# Altium PCB drv8313.pcbdoc
Units mil, origin at the board's own origin, x right, y up, seen from the top; angles counter-clockwise.
Board outline 1875 x 2452.74 mil, 2 copper layers (Top Layer, Bottom Layer); 13 components, 19 nets, 83 pads, 12 vias.
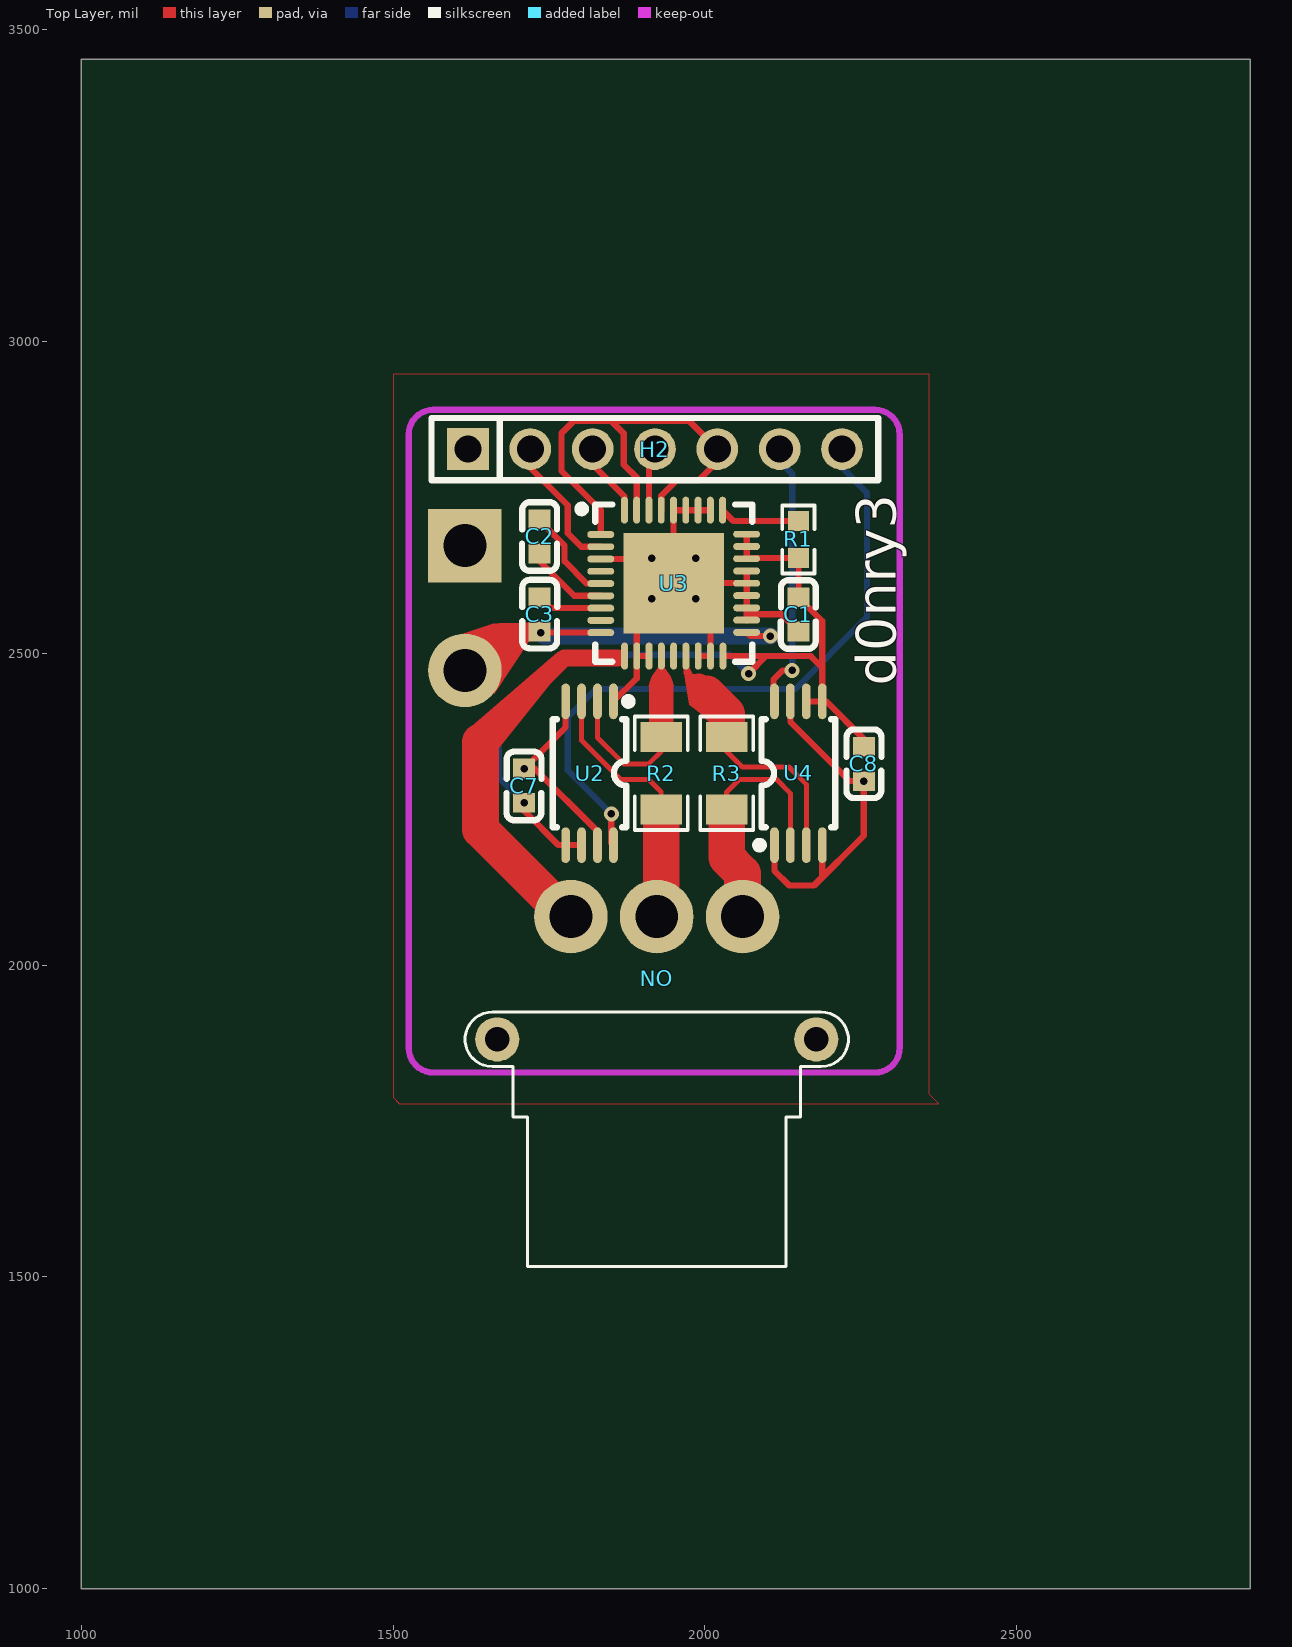
[diagram p0: Top Layer view]
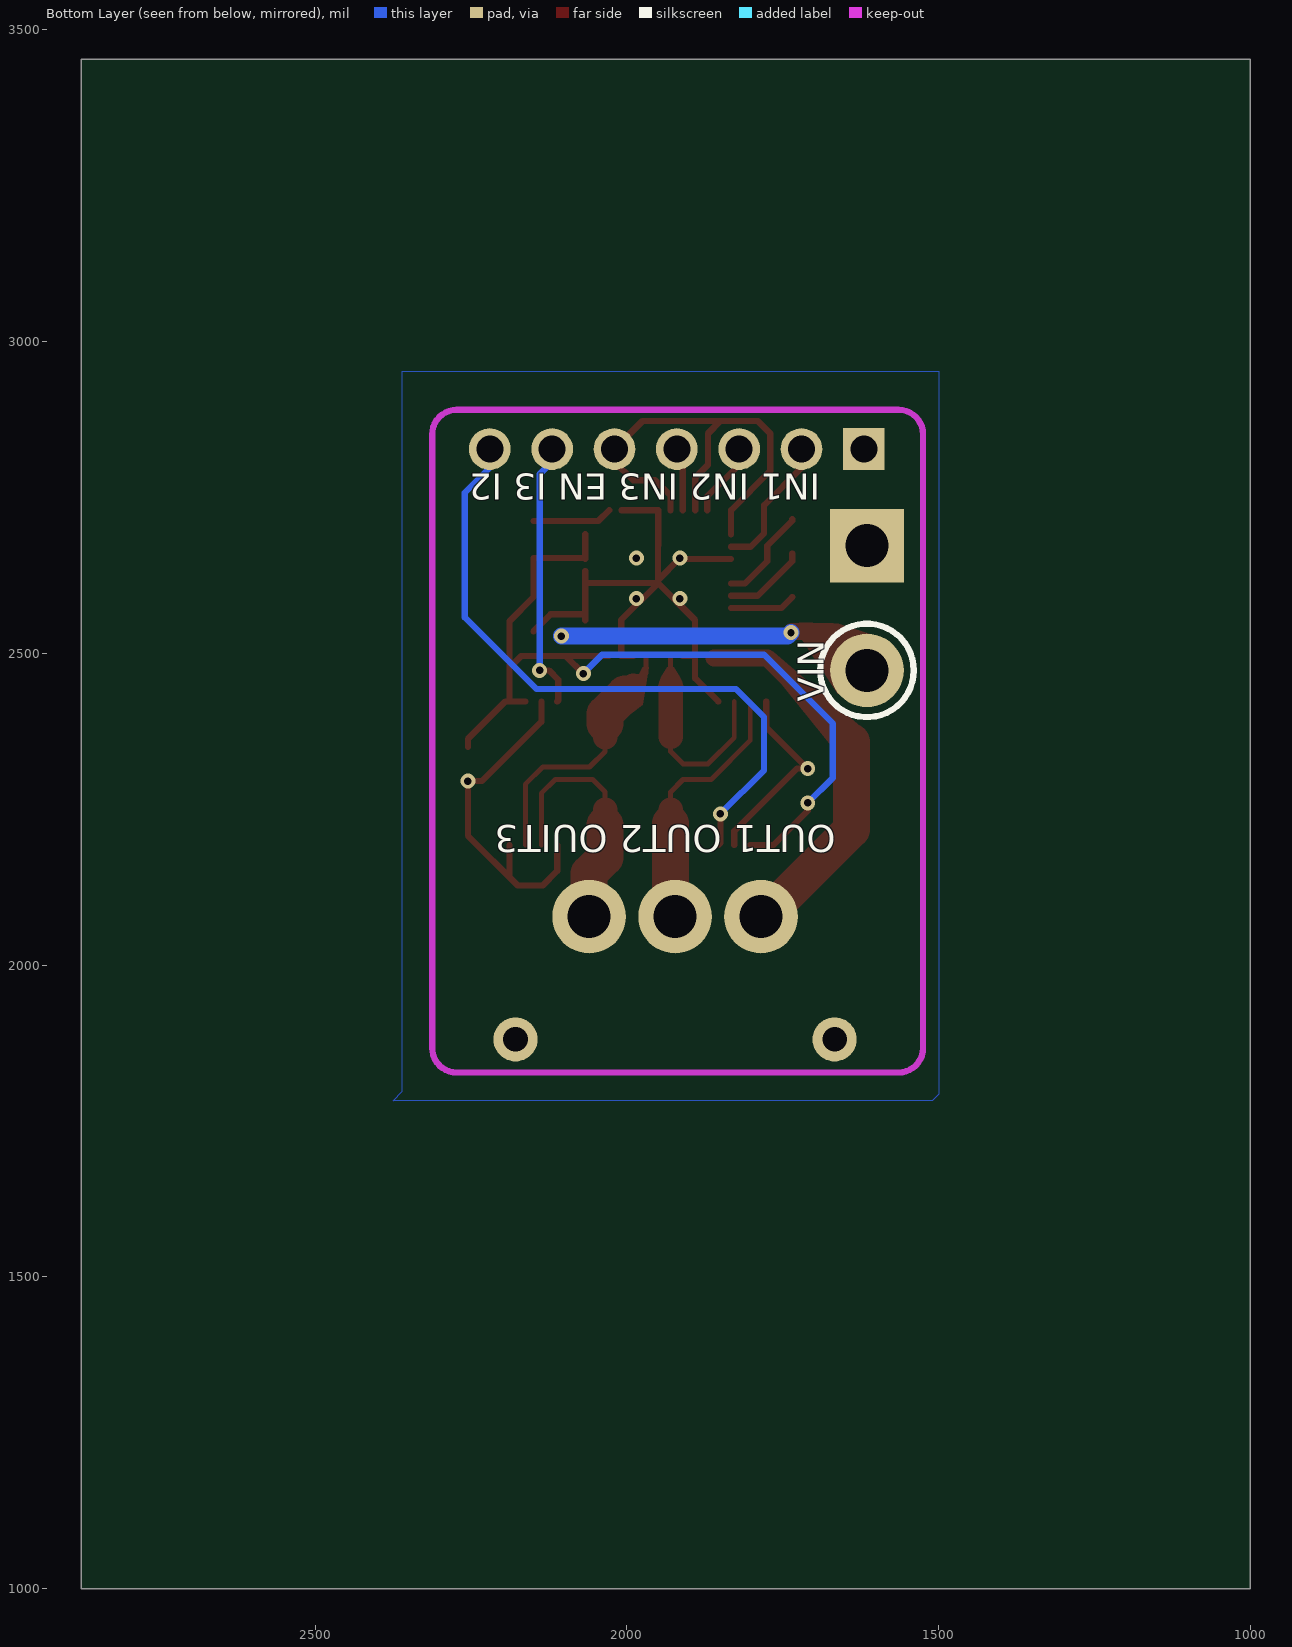
[diagram p1: Bottom Layer view, seen from below]

## Layer stack, top to bottom
Top Layer: signal copper (thickness not stored)
Dielectric: dielectric 12.6, FR-4, Dk 4.8
Bottom Layer: signal copper (thickness not stored)

## Board outline
2875,1000 1000,1000 1000,3452.74 2875,3452.74

## Components (designator, comment, footprint, x,y, rotation, side; value= is the part's Value field where it differs from the comment)
C1 "470nF" C0603 2150,2562.74 r90 top
C2 "10nF" C0603 1735,2687.74 r90 top
C3 "100nF" C0603 1735,2562.74 r270 top
C7 "100nF" C0603 1710,2287.74 r90 top
C8 "100nF" C0603 2255,2322.74 r270 top
H2 "KH-2.54PH180-1X7P-L11.5" HDR-TH_7P-P2.54-V-M 1920,2827.74 r0 top
NO "MR30PW-FB" MR30PW-FB 1785,2077.74 r90 top
R1 "10K" R0603 2150,2682.74 r270 top
R2 "0.01" R1206 1930,2307.74 r90 top
R3 "0.01" R1206 2035,2307.74 r270 top
U2 "INA240A2PWR" TSSOP-8_L4.4-W3.0-P0.65-LS6.4-BL 1815,2307.74 r180 top
U3 "DRV8313RHHR" VQFN-36_L6.0-W6.0-P0.50-TL-EP 1950,2612.74 r0 top
U4 "INA240A2PWR" TSSOP-8_L4.4-W3.0-P0.65-LS6.4-BL 2150,2307.74 r0 top

## Footprints (in the part's own frame and the unit in brackets; to place one, negate y for a bottom-side part, rotate by r counter-clockwise, add the part's x,y. Pads: shape width x height; smd on the part's side, far side on the other; paste and mask are expansions set on the pad)
C0603 [mm]
  rect 0.8x0.9 smd: 1(-0.7,0) 2(0.7,0)
  silkscreen extent -1.41,-0.71 1.39,0.72
HDR-TH_7P-P2.54-V-M [mm]
  rect 1.7x1.7 hole 1.1: 1(-7.62,0)
  round 1.7 hole 1.1: 2(-5.08,0) 3(-2.54,0) 4(0,0) 5(2.54,0) 6(5.08,0) 7(7.62,0)
  silkscreen extent -9.1,-1.27 9.1,1.27
MR30PW-FB [mm]
  round 3 hole 1.75: 1(0,0) 2(0,-3.5) 3(0,-7)
  round 1.8 hole 1: 4(-5,3) 5(-5,-10)
  silkscreen extent -14.26,-11.31 -3.89,4.31
R0603 [mil]
  rect 31.75x34.02 smd: 1(-29.66,0) 2(29.65,0)
  silkscreen extent -55,-26 55,26
R1206 [mil]
  rect 47.54x66.97 smd: 1(-58.22,0) 2(58.22,0)
  silkscreen extent -91,-42 91,42
TSSOP-8_L4.4-W3.0-P0.65-LS6.4-BL [mm]
  oval 0.353x1.454 smd: 1(-0.975,-2.927) 2(-0.325,-2.927) 3(0.325,-2.927) 4(0.975,-2.927) 5(0.975,2.927) 6(0.325,2.927) 7(-0.325,2.927) 8(-0.975,2.927)
  silkscreen extent -1.73,-3.08 1.5,2.2
VQFN-36_L6.0-W6.0-P0.50-TL-EP [mm]
  oval 1.1x0.28 smd: 1(-2.972,1.981) 2(-2.972,1.483) 3(-2.972,0.983) 4(-2.972,0.483) 5(-2.972,-0.018) 6(-2.972,-0.518) 7(-2.972,-1.018) 8(-2.972,-1.519) 9(-2.972,-2.017) 19(2.972,-2.006) 20(2.972,-1.509) 21(2.972,-1.008) 22(2.972,-0.508) 23(2.972,-0.008) 24(2.972,0.493) 25(2.972,0.993) 26(2.972,1.494) 27(2.972,1.991)
  oval 0.28x1.1 smd: 10(-2.001,-2.972) 11(-1.504,-2.972) 12(-1.003,-2.972) 13(-0.503,-2.972) 14(-0.002,-2.972) 15(0.498,-2.972) 16(0.998,-2.972) 17(1.499,-2.972) 18(2.007,-2.972) 28(1.991,2.972) 29(1.494,2.972) 30(0.993,2.972) 31(0.493,2.972) 32(-0.008,2.972) 33(-0.508,2.972) 34(-1.008,2.972) 35(-1.509,2.972) 36(-2.006,2.972)
  rect 4.1x4.1 smd: 37(0,0)
  silkscreen extent -3.9,-3.2 3.2,3.2

## Free pads (board coordinates)
  round 118.11 hole 68.9: 1(1615,2472.74)
  rect 118.11x118.11 hole 68.9: 1(1615,2672.74)

## Via types
v1: diameter 24, hole 12, Top Layer to Bottom Layer, tented both sides, 12 vias

## Nets (pads, with @x,y where several pads share a name; then routed paths per layer and width w, separated by ;. In a path a pad name is that pad's centre, name@x,y a point inside that pad or via, vN(x,y) a via of type N, cw(c..) or ccw(c..) an arc to the next point about the centre after c; other vN are vias at no path point)
GND: C1.1 C7.2 C8.2 H2.1 NO.4 NO.5 pad.1@1615,2672.74 U2.1 U2.4 U2.7 U3.3 U3.11 U3.12 U3.16 U3.17 U3.20 U3.21 U3.22 U3.23 U3.24 U3.29 U3.30 U3.31 U3.32 U3.37 U4.1 U4.4 U4.7 | length 1920.8
  Top Layer w10: v1(1710,2315.34) 1776.61,2381.91 U2.4 ; v1(1710,2315.34) 1727.4,2315.34 1827.8,2214.94 U2.7 ; U3.3 1913.69,2651.43 v1(1915,2652.74) 1950,2617.74 U3.37 ; U2.1@1853.4,2422.94 1890.8,2459.94 U3.11 ; U3.12 U3.11 ; U3.16 U3.17 2009.01,2553.73 U3.37 ; U3.29 U3.32 U3.37 ; U3.23 U3.37 ; U3.24 U3.20 2067,2562.74 2122.4,2562.74 C1.1@2150,2535.14 ; U4.1 2111.6,2151.14 2135,2127.74 2175,2127.74 ; U4.7 2137.21,2390.53 2232.56,2295.18 v1(2255,2295.18) 2255,2207.74 2175,2127.74 ; 2170,2127.74 2175,2127.74 ; U4.4 2188.4,2141.14 2175,2127.74 ; U3.11 1890.81,2553.55 U3.37
  other v1: 1915,2587.74 1985,2587.74 1985,2652.74
M1_EN: H2.5 U3.1 U3.33 U3.35 | length 780.6
  Top Layer w10: U3.1 1833,2729.74 1770,2792.74 1770,2852.74 1790,2872.74 1850,2872.74 ; U3.35 1890.6,2782.14 1870,2802.74 1870,2852.74 1850,2872.74 ; U3.33 1930.01,2752.73 1954.99,2777.74 1990,2777.74 2020,2807.74 H2.5 1975,2872.74 1850,2872.74
M1_I2: H2.7 U2.8 | length 1068.5
  Top Layer w10: v1(1850,2242.74) 1850,2195.89 U2.8
  Bottom Layer w10: v1(1850,2242.74) 1780,2312.74 1780,2397.74 1825,2442.74 2145,2442.74 2260,2557.74 2260,2757.74 2220,2797.74 H2.7
M1_I3: H2.6 U4.8 | length 434.9
  Top Layer w10: U4.8 2110,2424.59 2110,2457.74 2125,2472.74 v1(2140,2472.74)
  Bottom Layer w10: H2.6 2120,2807.74 2140,2787.74 v1(2140,2472.74)
M1_IN1: H2.2 U3.2 | length 221.8
  Top Layer w10: H2.2 1720,2797.74 1780,2737.74 1780,2692.74 1801.61,2671.13 U3.2
M1_IN2: H2.3 U3.36 | length 119.1
  Top Layer w10: H2.3 1820,2802.74 1871.01,2751.73 U3.36
M1_IN3: H2.4 U3.34 | length 102
  Top Layer w10: U3.34 1910.31,2818.05 H2.4
M1_OUT1: NO.1 U3.10 | length 628.1
  Top Layer w27.56: 1640,2357.74 1775,2492.74 1860,2492.74
  Top Layer w59.05: 1640,2357.74 1640,2217.74 NO.1@1790,2067.74
M1_OUT2: R2.2 U2.2 U3.13 | length 420.7
  Top Layer w7.87: U2.2@1827.8,2422.94 1827.8,2364.94 1870,2322.74 1910,2322.74 1930,2342.74 1930,2365.94 U3.13@1930,2495.74
  Top Layer w39.37: R2.2 1930,2447.7
M1_OUT3: R3.1 U3.15 U4.3 | length 587.9
  Top Layer w7.87: U3.15 1969.6,2468.14 2035,2402.74 2035,2365.94 2035,2342.74 2060,2317.74 2135,2317.74 2162.8,2289.94 U4.3
  Top Layer w39.37: 1990,2447.74 2035,2402.74 R3.1@2035,2365.94
  Top Layer w59.05: 2003,2434.74 2035,2402.74 R3.1@2035,2387.74
OUT2_M1: NO.2 R2.1 U2.3 | length 561.3
  Top Layer w7.87: U2.3@1802.2,2422.94 1802.2,2360.54 1865,2297.74 1910,2297.74 1930,2277.74 R2.1
  Top Layer w39.37: NO.2 1930,2077.74 R2.1
  Top Layer w59.05: NO.2@1930,2097.74 1930,2133.54 R2.1@1930,2227.34
OUT3_M1: NO.3 R3.2 U4.2 | length 640.3
  Top Layer w7.87: R3.2 2035,2277.74 2055,2297.74 2115,2297.74 2137.2,2275.54 U4.2
  Top Layer w39.37: R3.2 2035,2182.74 2060.6,2157.14 NO.3 2060.6,2147.14
  Top Layer w59.05: 2035,2224.74 2035,2172.74 2060.6,2147.14 NO.3
S$1045: 
U3_5: C2.2 U3.5 | length 157
  Top Layer w10: C2.2 1735,2712.74 1775,2672.74 1775,2647.74 1810.7,2612.04 U3.5
U3_6: C2.1 U3.6 | length 133.3
  Top Layer w10: C2.1@1735,2660.14 1735,2647.74 1790.4,2592.34 U3.6
U3_7: C3.1 U3.7 | length 105.3
  Top Layer w10: C3.1 1752.67,2572.63 U3.7
U3_28: R1.1 U3.28 | length 128.8
  Top Layer w10: U3.28 2045.74,2712.4 R1.1
VCC_3V3: C1.2 C7.1 C8.1 R1.2 U2.5 U2.6 U3.18 U3.25 U3.26 U3.27 U4.5 U4.6 | length 1506.6
  Top Layer w10: v1(1710,2260.14) 1710,2247.74 1765.2,2192.54 U2.5 ; U2.5 U2.6 ; U3.18 2169.9,2495.74 ; U3.27 U3.25 2068.26,2653.08 R1.2 C1.2 2188.39,2551.91 U4.5 ; v1(2070,2467.74) 2098,2495.74 2169.9,2495.74 ; U4.6 U4.5 ; 2188.4,2477.24 2169.9,2495.74 ; C8.1 2255,2362.74 2194.76,2422.98 U4.5
  Bottom Layer w10: v1(1710,2260.14) 1670,2300.14 1670,2387.74 1780,2497.74 2040,2497.74 v1(2070,2467.74)
VM: C3.2 pad.1@1615,2472.74 U3.9 U3.19 | length 660.5
  Top Layer w10: C3.2 v1(1736.85,2533.33) U3.9 ; U3.19 2073,2527.74 v1(2105,2527.74)
  Top Layer w27.56: pad.1@1610,2472.74 1672.4,2535.14 C3.2@1735,2535.14
  Bottom Layer w27.56: v1@1736.9,2533.34 1742.5,2527.74 v1(2105,2527.74)
pads on no net: U3.4 U3.8 U3.14

## Polygon pours and split planes (outlines as drawn)
GND on Top Layer (solid): 1500,1787.74 1510,1777.74 2375,1777.74 2360,1792.74 2360,2947.74 1500,2947.74
GND on Bottom Layer (solid): 1500,1792.74 1510,1782.74 2375,1782.74 2360,1797.74 2360,2952.74 1500,2952.74

## Keep-outs
Keep-Out Layer:
  lines w10: 1525,1867.11 ccw(c1564.37,1867.11) 1564.37,1827.74 ; 1525,2851.36 cw(c1564.37,2851.36) 1564.37,2890.73 ; 2273.03,1827.74 ccw(c2273.03,1867.11) 2312.4,1867.11 ; 2273.03,2890.73 cw(c2273.03,2851.36) 2312.4,2851.36

## Other copper
Top Layer:
  region net M1_OUT3: 2020,2457.74 1995,2402.74 1975,2417.74 1965,2477.74 1975,2477.74 1980,2467.74
  region net M1_OUT2: 1910,2447.74 1950,2447.74 1945,2462.74 1935,2477.74 1925,2477.74 1915,2462.74
  region net M1_OUT1: 1765,2502.74 1625,2382.74 1665,2342.74 1765,2467.74
  region net VM: 1661.88,2435.24 1620.62,2477.74 1606.88,2530.24 1660,2547.74 1723.12,2550.24 1720,2522.74

## Silkscreen, mask and mechanical layers (free items; w line width, h text height)
Top Overlay:
  text "d0nry3" at 2306.5,2447.74 h62.99 r90
Bottom Overlay:
  circle w10: c1615,2472.74 r75
  text "IN1 IN2 IN3 EN I3 I2" at 1690,2788.41 h41.34 r180
  text "VIN" at 1684.33,2422.74 h41.34 r270
  text "OUT1 OUT2 OUIT3" at 1665,2224.39 h43.31 r180